# EAGLE board i2c_level_shifter (EAGLE 6.1)
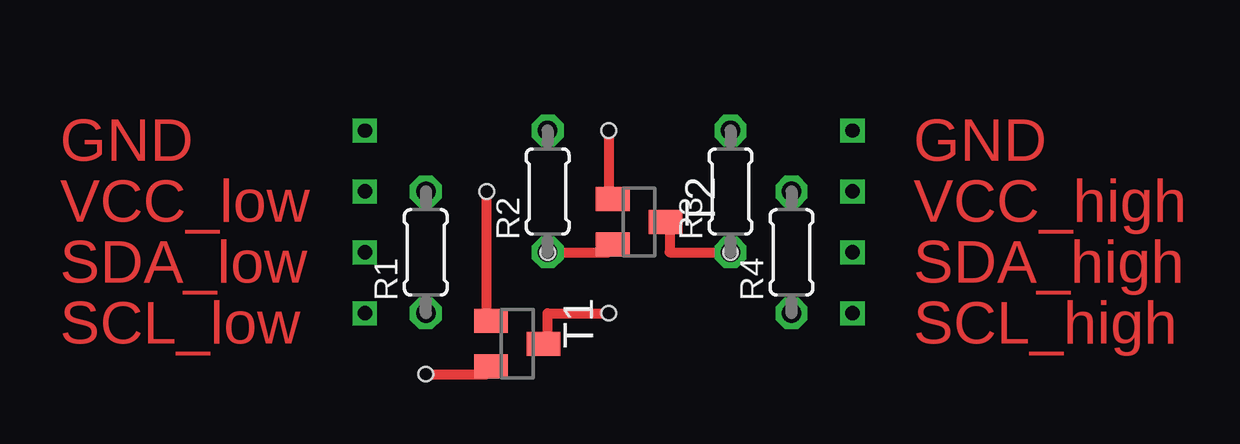
[diagram p0: board, top side]
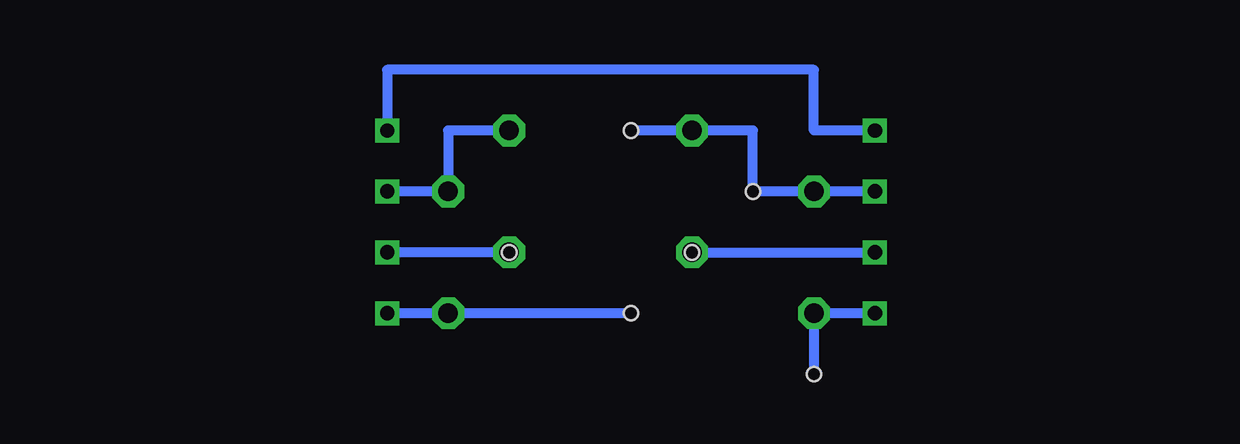
[diagram p1: board, bottom side, seen from below]

No outline drawn. Coordinates in mm, seen from the top.
Copper layers (1*16): Top 0.035mm / dielectric 1.5mm / Bottom 0.035mm
Design rules: minimum track width 10mil, minimum drill 24mil, track to track 8mil, track to pad 8mil, pad to pad 8mil, via to via 8mil, smd to smd 8mil, copper to edge 40mil, drill to drill 8mil, minimum pad ring 10mil, minimum via ring 8mil, stop-mask expansion 4mil, vias tented up to drill 0mil, thermal gap 10mil
Holes 0.6 mm at 10.16,12.7 15.24,15.24 12.7,10.16 15.24,7.62 7.62,5.08 20.32,10.16
tKeepout: area 3.8,6.3 to 6.3,16.5; area 24.1,6.3 to 26.7,16.5

## Footprints (pad centres in the part's own frame; a part is rotated, then mirrored left to right if it is on the bottom)
0204/5 = drill 0.813 octagon: 1 -2.54,0; 2 2.54,0
SOT23 = smd 1 x 1.4: 1 -0.95,-1.1; 2 0.95,-1.1; 3 0,1.1

## Placement (x,y rotation side)
R1  10k  [0204/5]  7.62,10.16 90 top
R2  10k  [0204/5]  12.7,12.7 90 top
R3  10k  [0204/5]  20.32,12.7 90 top
R4  10k  [0204/5]  22.86,10.16 90 top
T1  FDV303N  [SOT23]  11.43,6.35 270 top
T2  FDV303N  [SOT23]  16.51,11.43 270 top

## Library data of the parts
R1-R4 = resistor
T1 T2 = transistor-small-signal

## Nets
S$12: R3.2 R4.2
S$13: R1.1

## Tracks (layer width: path | path; a pad name or v marks a point on that pad's centre or on a via)
S$1
  Top 0.406: 10.16,7.62 10.16,12.7
S$2
  Top 0.406: 12.7,10.16 15.24,10.16
S$3  (via drill 0.6)
  Bottom 0.406: 12.7,10.16 v5.08,10.16
S$4
  Top 0.406: 7.62,5.08 10.16,5.08
S$5  (via drill 0.6)
  Bottom 0.406: v5.08,15.24 7.62,15.24 7.62,17.78 25.4,17.78 v25.4,15.24
S$6
  Top 0.406: 15.24,15.24 15.24,12.7
S$8
  Top 0.406: 12.7,6.35 12.7,7.62 15.24,7.62
S$9
  Top 0.406: 17.78,11.43 17.78,10.16 20.32,10.16
S$10  (via drill 0.6)
  Bottom 0.406: v5.08,12.7 10.16,12.7 10.16,15.24 15.24,15.24
S$11  (via drill 0.6)
  Bottom 0.406: 20.32,10.16 v25.4,10.16
S$12  (via drill 0.6)
  Bottom 0.406: R3.2 22.86,15.24 R4.2 v25.4,12.7
S$13  (via drill 0.6)
  Bottom 0.406: v5.08,7.62 R1.1 7.62,5.08
S$14
  Bottom 0.406: 15.24,7.62 25.4,7.62
S$15  (via drill 0.6)
  other vias: 25.4,7.62

## Text on the board
Top: GND | GND | VCC_low | VCC_high | SDA_low | SDA_high | SCL_low | SCL_high